# Altium PCB PCB3.PcbDoc
Units mm, origin at the board's own origin, x right, y up, seen from the top; angles counter-clockwise.
Board outline 58.4 x 51.85 mm, 2 copper layers (Top Layer, Bottom Layer); 29 components, 25 nets, 113 pads, 3 vias.
Unrouted connection lines stored in the file: 5.
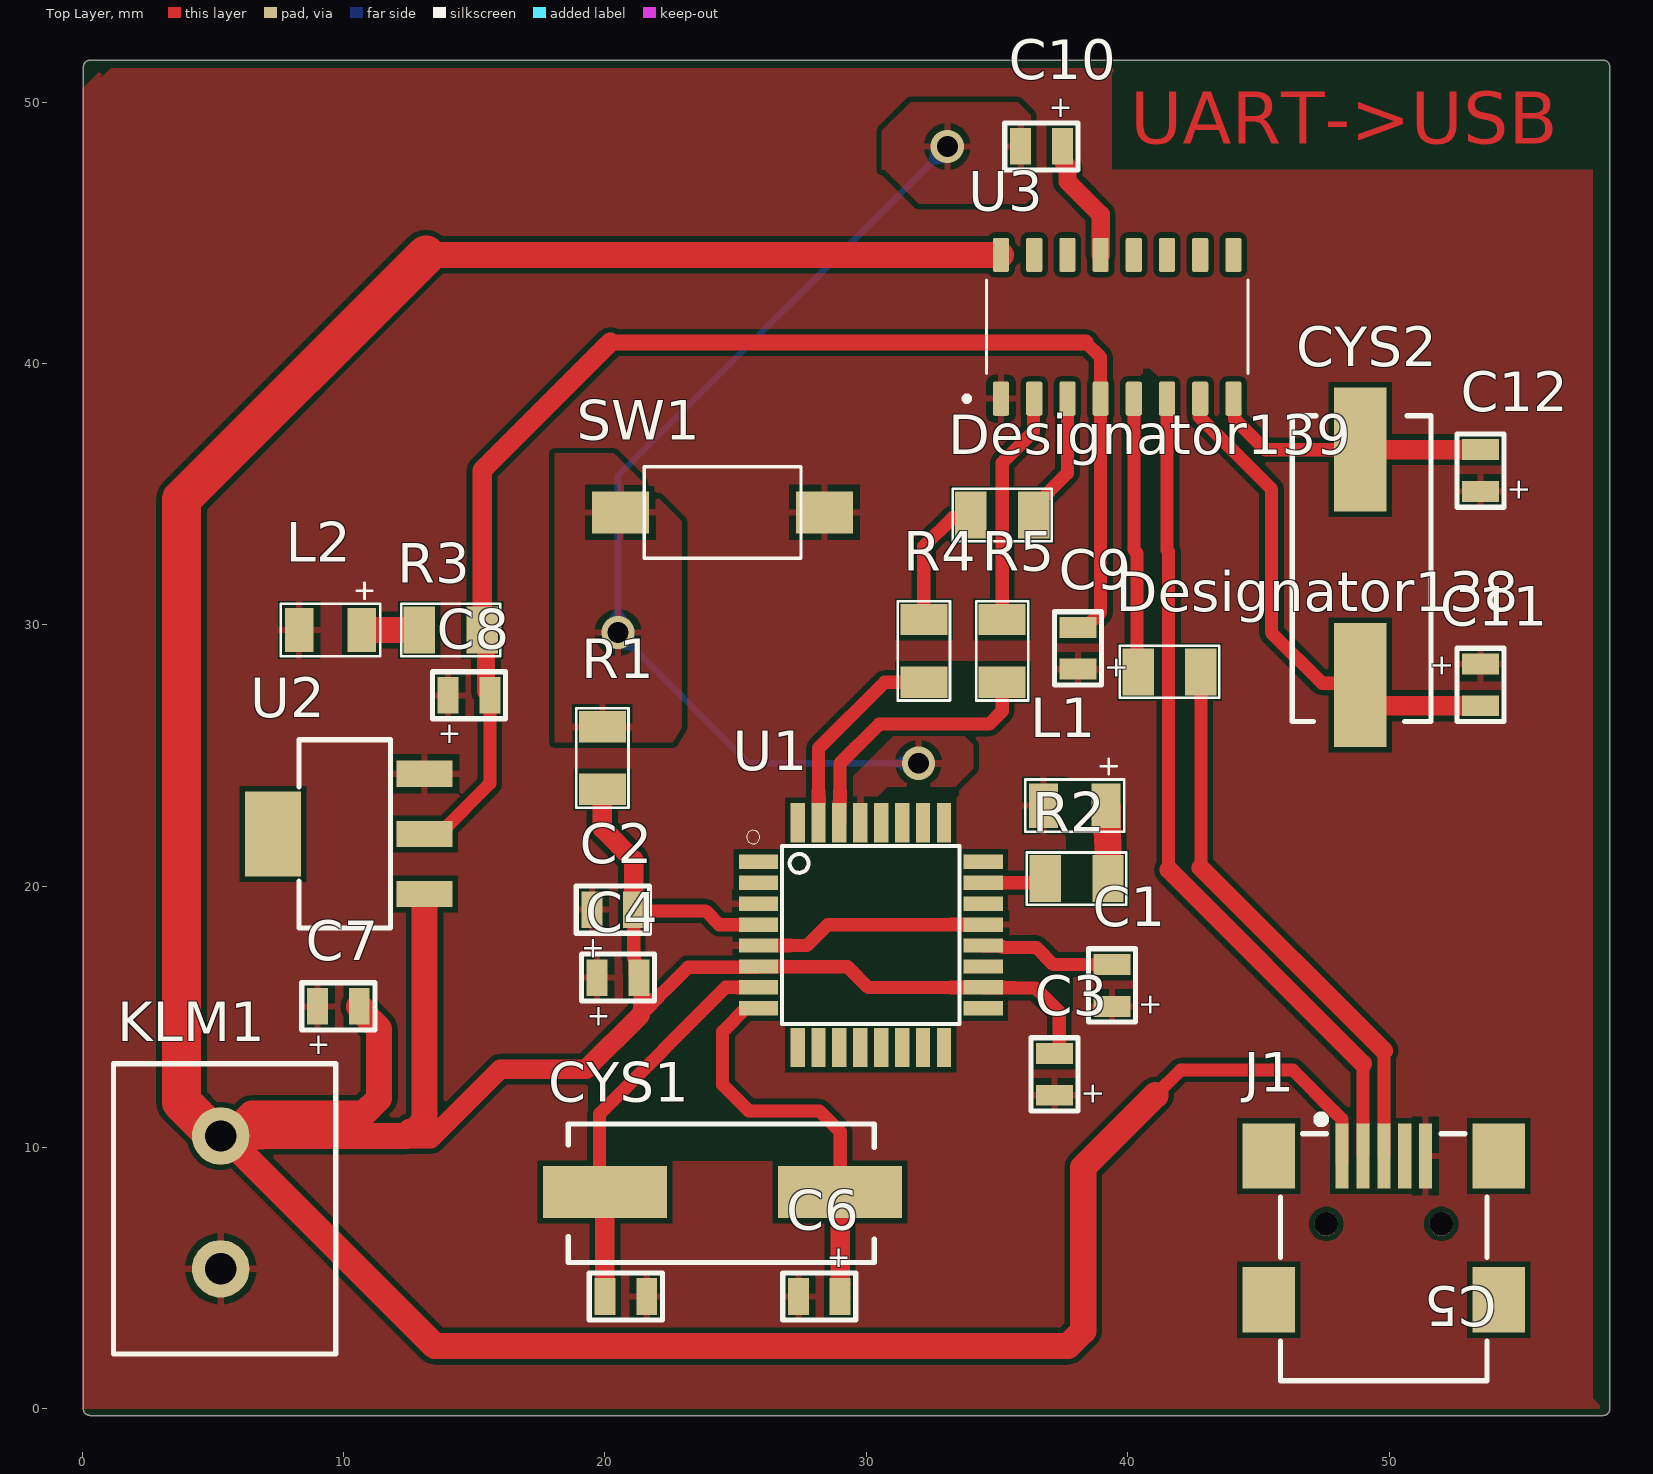
[diagram p0: Top Layer view]
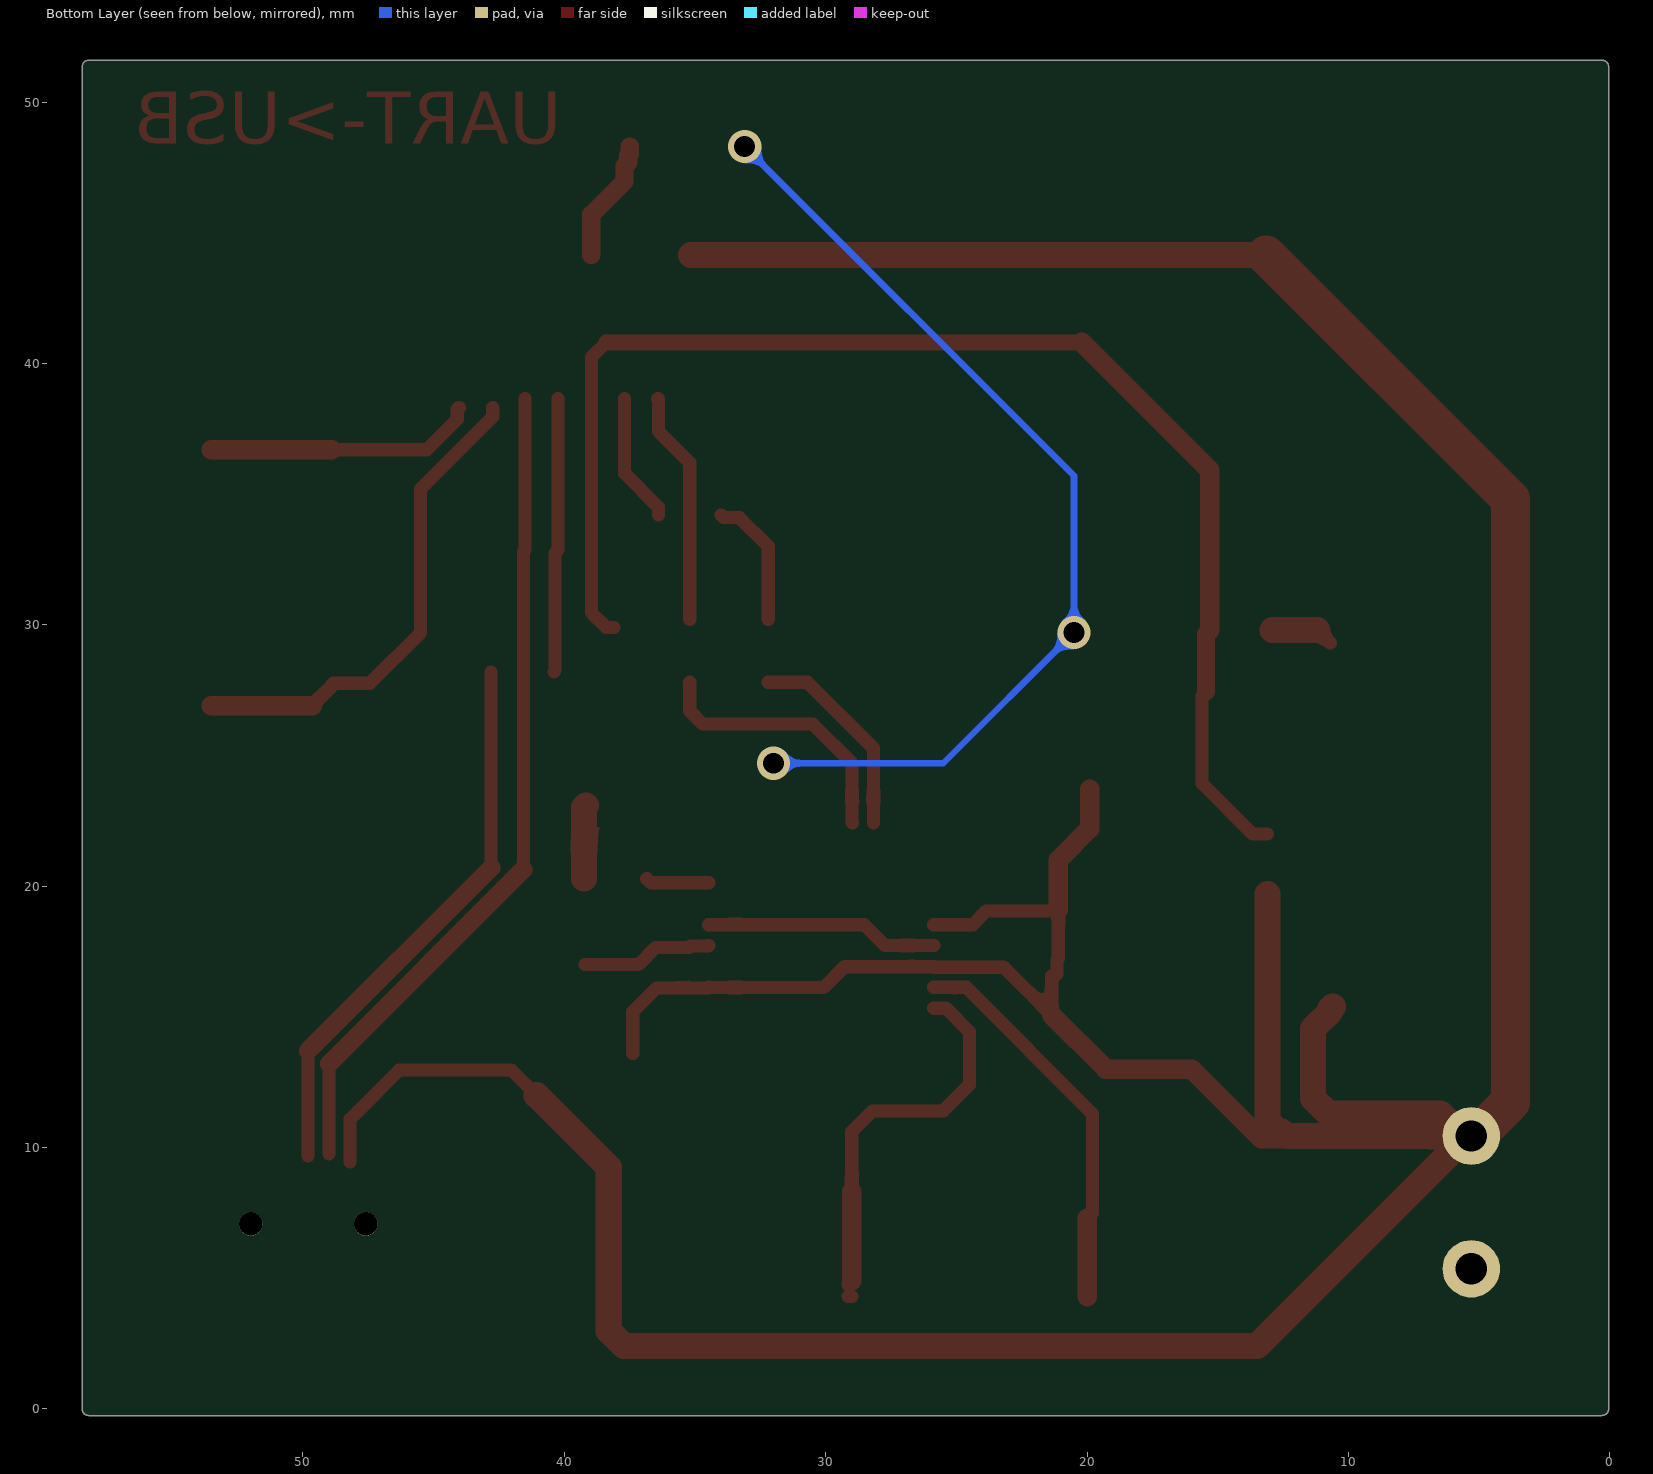
[diagram p1: Bottom Layer view, seen from below]
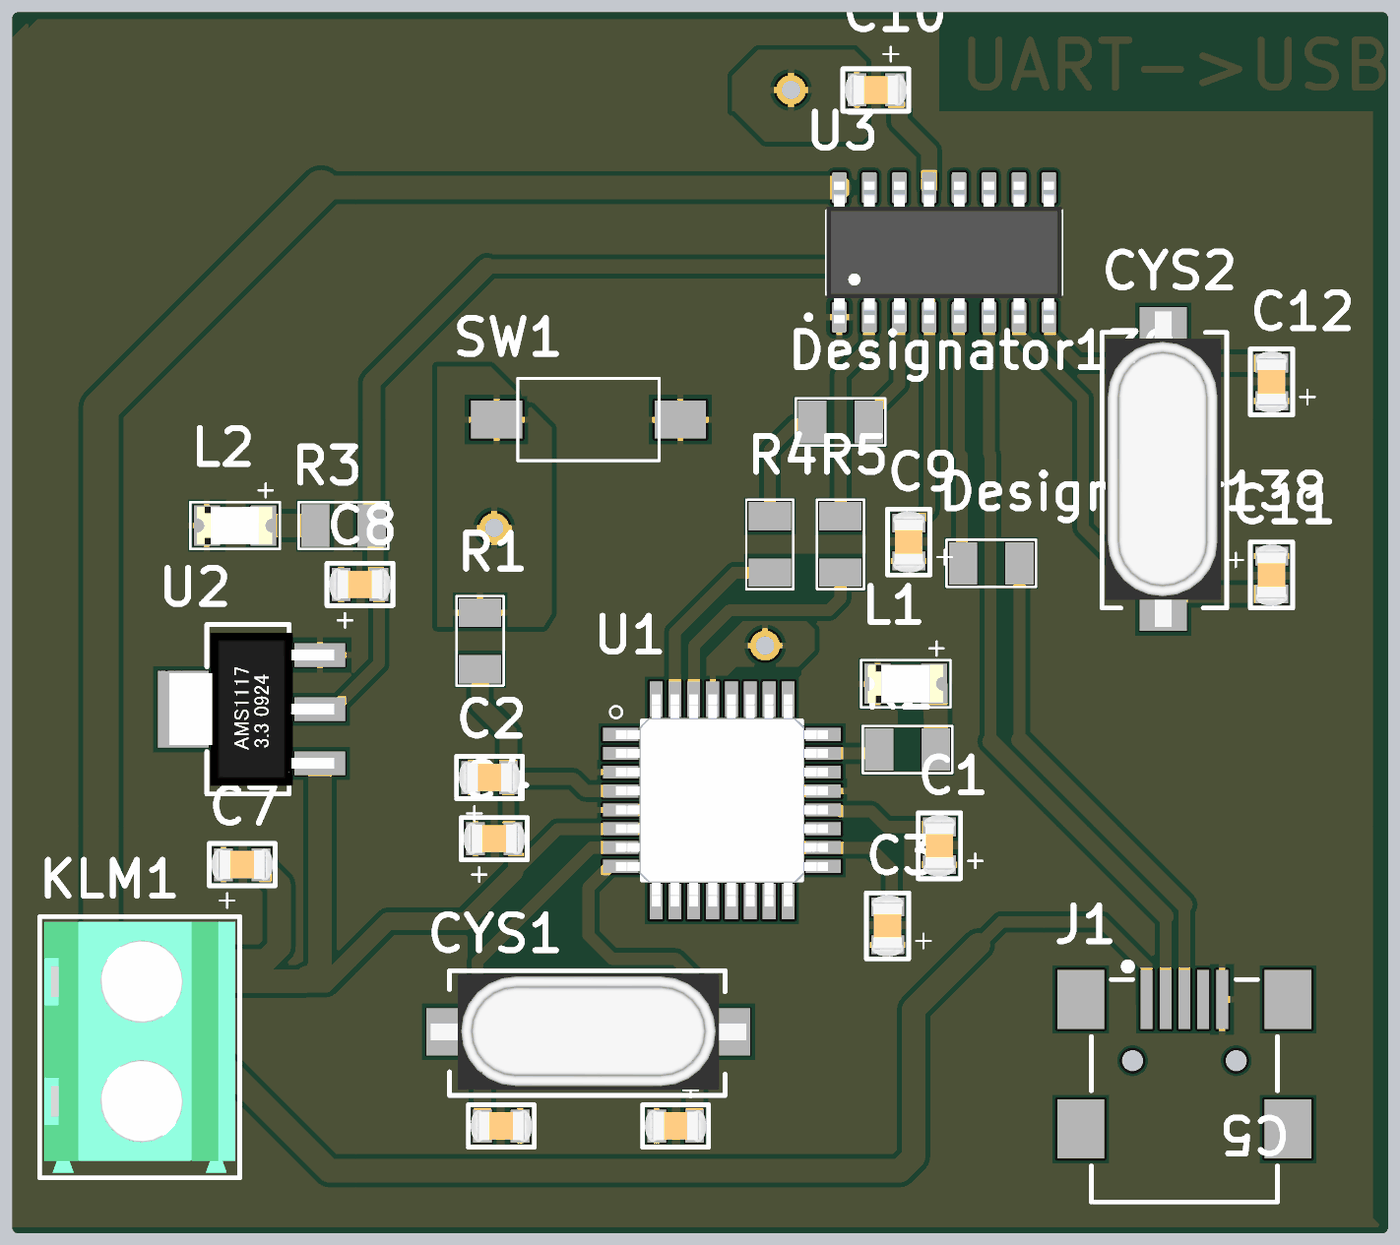
[diagram p2: 3D render of the assembled board from above, using the file's embedded part models]

## Layer stack, top to bottom
Top Solder: solder mask 0.0102, Solder Resist, Dk 3.5
Top Layer: signal copper 0.0356
Dielectric 1: dielectric 0.32, FR-4, Dk 4.8
Bottom Layer: signal copper 0.0356
Bottom Solder: solder mask 0.0102, Solder Resist, Dk 3.5

## Board outline
0.046,0 0.046,51.346 cw(c0.3,51.346) 0.3,51.6 58.192,51.6 cw(c58.192,51.346) 58.446,51.346 58.446,0 cw(c58.192,0) 58.192,-0.254 0.3,-0.254 cw(c0.3,0)

## Design rules (kind name [scope] priority, off if disabled: settings)
Clearance [All] p1: gap=0.2 ignorepadtopadclearanceinfootprint=FALSE
PolygonConnect [All] p1: connectstyle=Relief reliefconductorwidth=0.254 reliefentries=4 polygonreliefangle="90 Angle" airgapwidth=0.254
RoutingVias [All] p1: holewidth=0.711 width=1.27 viastyle="Through Hole" minholewidth=0.711 minwidth=1.27 maxholewidth=0.711 maxwidth=1.27
SolderMaskExpansion [All] p1: expansion=0.102 istentingtop=FALSE
Width [All] p1: maxlimit=1.5 minlimit=0.254 preferedwidth=0.254
30 further rules are at their usual default settings.

## Classes and differential pairs
component class Sheet3: C1 C2 C3 C4 C5 C6 C7 C8 C9 C10 C11 C12 CYS1 CYS2 J1 KLM1 L1 L2 R1 R2 R3 R4 R5 SW1 U1 U2 U3

## Components (designator, comment, footprint, x,y, rotation, side; value= is the part's Value field where it differs from the comment)
C1 "100nF" CAP_805 39.4,16.2 r90 top
C2 "1uF" CAP_805 20.3,19.1 r0 top
C3 "4.7uF" CAP_805 37.2,12.8 r90 top
C4 "1uF" CAP_805 20.5,16.5 r0 top
C5 "22pF" CAP_805 20.8,4.3 r180 top
C6 "22pF" CAP_805 28.2,4.3 r180 top
C7 "100nF" CAP_805 9.8,15.4 r0 top
C8 "100nF" CAP_805 14.8,27.3 r0 top
C9 "100nF" CAP_805 38.1,29.1 r90 top
C10 "100nF" CAP_805 36.7,48.3 r180 top
C11 "22pF" CAP_805 53.5,27.7 r270 top
C12 "22pF" CAP_805 53.5,35.9 r90 top
CYS1 "Kristal - HC-49Us" "Kristal - HC-49Us -smd" 24.5,8.3 r0 top
CYS2 "Kristal - HC-49Us" "Kristal - HC-49Us -smd" 48.9,32.2 r90 top
Designator138 "Comment" RES_1206 41.6,28.2 r0 top
Designator139 "Comment" RES_1206 35.2,34.2 r0 top
J1 "USB 2.0" 65100516121 49.8,5.8 r0 top
KLM1 "2 Pin Klemens" "5.08mm-2 pin" 5.3,7.9 r90 top
L1 "Led Blue" "Led 1206" 37.975,23.08 r180 top
L2 "Led Blue" "Led 1206" 9.5,29.8 r180 top
R1 "RES 1K 1206" RES_1206 19.9,24.9 r270 top
R2 "220" RES_1206 38.045,20.286 r180 top
R3 "220" RES_1206 14.1,29.8 r0 top
R4 "RES 1K 1206" RES_1206 32.2,29 r270 top
R5 "RES 1K 1206" RES_1206 35.2,29 r270 top
SW1 "1437566-3" SW_1437566-3 24.5,34.3 r180 top
U1 "ATMEGA328P-AU" QFP80P900X900X120-32N 30.171,18.127 r0 top
U2 "AMS1117" AMS1117 10.2,22 r90 top
U3 "CH340G" SOIC127P600X180-16N 39.6,41.4 r90 top

## Footprints (in the part's own frame and the unit in brackets; to place one, negate y for a bottom-side part, rotate by r counter-clockwise, add the part's x,y. Pads: shape width x height; smd on the part's side, far side on the other; paste and mask are expansions set on the pad)
"5.08mm-2 pin" [mm]
  round 2.2 hole 1.2 mask+0.05: 1(-2.54,0) 2(2.54,0)
  silkscreen extent -5.8,-4.4 5.3,4.1, body extent -5.59,-4.2 5.07,3.9, height 10.2
65100516121 [mm]
  rect 0.5x2.5 smd: 1(-1.6,3.875) 2(-0.8,3.875) 3(0,3.875) 4(0.8,3.875) 5(1.6,3.875)
  rect 2x2.5 smd: S1(-4.4,3.875) S2(4.4,3.875) S3(4.4,-1.625) S4(-4.4,-1.625)
  round 0.9 hole 0.9 unplated: ""(-2.2,1.275) ""(2.2,1.275)
  silkscreen extent -3.95,-4.72 3.95,5.37
AMS1117 [mm]
  rect 1x2.15 smd mask+0.05: 1(-2.3,-2.9) 2(0,-2.9) 3(2.3,-2.9)
  rect 3.25x2.15 smd mask+0.05: ""(0,2.9)
  silkscreen extent -3.6,-1.6 3.6,1.9, body extent -3.25,-3.5 3.25,3.5, height 1.85
CAP_805 [mm]
  rect 0.8x1.4 smd mask+0.05: 1(-0.8,0) 2(0.8,0)
  silkscreen extent -1.4,-0.9 1.4,0.9, body extent -1.3,-0.68 1.3,0.68, height 0.9
"Kristal - HC-49Us -smd" [mm]
  rect 4.75x2 smd mask+0.05: 1(-4.5,0) 2(4.5,0)
  silkscreen extent -5.9,-2.7 5.8,2.6, body extent -6.7,-2.45 6.7,2.45, height 5.08
"Led 1206" [mm]
  rect 1.1x1.7 smd mask+0.05: 1(-1.2,0) 2(1.2,0)
  silkscreen extent -1.9,-1.8 1.9,1, body extent -1.59,-0.8 1.61,0.8, height 1.1
QFP80P900X900X120-32N [mm]
  rect 1.5x0.55 smd: 1(-4.3,2.8) 2(-4.3,2) 3(-4.3,1.2) 4(-4.3,0.4) 5(-4.3,-0.4) 6(-4.3,-1.2) 7(-4.3,-2) 8(-4.3,-2.8) 17(4.3,-2.8) 18(4.3,-2) 19(4.3,-1.2) 20(4.3,-0.4) 21(4.3,0.4) 22(4.3,1.2) 23(4.3,2) 24(4.3,2.8)
  rect 0.55x1.5 smd: 9(-2.8,-4.3) 10(-2,-4.3) 11(-1.2,-4.3) 12(-0.4,-4.3) 13(0.4,-4.3) 14(1.2,-4.3) 15(2,-4.3) 16(2.8,-4.3) 25(2.8,4.3) 26(2,4.3) 27(1.2,4.3) 28(0.4,4.3) 29(-0.4,4.3) 30(-1.2,4.3) 31(-2,4.3) 32(-2.8,4.3)
  silkscreen extent -4.75,-3.4 3.4,4, body extent -4.5,-4.5 4.5,4.5, height 1.23
RES_1206 [mm]
  rect 1.2x1.8 smd mask+0.05: 1(-1.2,0) 2(1.2,0)
  silkscreen extent -1.9,-1 1.9,1, body extent -1.57,-0.82 1.57,0.82, height 0.53
SOIC127P600X180-16N [mm]
  rrect25% 1.31x0.62 smd: 1(-2.75,4.445) 2(-2.75,3.175) 3(-2.75,1.905) 4(-2.75,0.635) 5(-2.75,-0.635) 6(-2.75,-1.905) 7(-2.75,-3.175) 8(-2.75,-4.445) 9(2.75,-4.445) 10(2.75,-3.175) 11(2.75,-1.905) 12(2.75,-0.635) 13(2.75,0.635) 14(2.75,1.905) 15(2.75,3.175) 16(2.75,4.445)
  silkscreen extent -2.85,-5 1.78,5.85, body extent -3,-5 3,5, height 1.8
SW_1437566-3 [mm]
  rect 2.18x1.6 smd: 1(-3.9,0) 2(3.9,0)
  silkscreen extent -3,-1.75 3,1.75

## Part data
C1 C2 C3 C4 C5 C6 C7 C8 C9 C10 C11 C12: library part "CAP 22uf 0805", "0805 smd"
CYS1 CYS2: "Smd tipi kristal"
J1: "USB - mini B USB 2.0 Receptacle Connector 5 Position Surface Mount, Right Angle", Package=None, Availability="In Stock", Check_prices=https://www.snapeda.com/parts/65100516121/Wurth+Elektronik/view-part/?ref=eda, MF="WÃ¼rth Elektronik", MP=65100516121, Price=None, Purchase-URL=https://pricing.snapeda.com/search/part/65100516121/?ref=eda, SnapEDA_Link=https://www.snapeda.com/parts/65100516121/Wurth+Elektronik/view-part/?ref=snap
KLM1: "5.08mm 2 pin klemens"
R2 R3: library part "RES 1K 1206"
SW1: "Switch Tactile OFF (ON) SPST Rectangular Button Gull Wing 0.05A 12VDC SMD Loose Piece", Package=None, Availability=Unavailable, MP=1437566-3, Price=None
U1: "AVR AVRÂ® ATmega Microcontroller IC 8-Bit 20MHz 32KB (16K x 16) FLASH 32-TQFP (7x7)", Package="TQFP-32 Microchip", Availability="In Stock", Check_prices=https://www.snapeda.com/parts/ATMEGA328P-AU/Microchip/view-part/?ref=eda, MF="Microchip Technology", MP=ATMEGA328P-AU, Price=None, Purchase-URL=https://pricing.snapeda.com/search/part/ATMEGA328P-AU/?ref=eda, SnapEDA_Link=https://www.snapeda.com/parts/ATMEGA328P-AU/Microchip/view-part/?ref=snap
U2: "3V3 Voltage Regulator", Case/Package=SOT-89, Vmax=12V, Iout=1A
U3: "USB Interface Integrated Circuit", Package=None, Availability="Not in stock", Check_prices=https://www.snapeda.com/parts/Ch340G/WCH/view-part/?ref=eda, MF=WCH, MP=Ch340G, Price=None, SnapEDA_Link=https://www.snapeda.com/parts/Ch340G/WCH/view-part/?ref=snap

## Via types
v1: diameter 1.27, hole 0.8, Top Layer to Bottom Layer, 3 vias

## Nets (pads, with @x,y where several pads share a name; then routed paths per layer and width w, separated by ;. In a path a pad name is that pad's centre, name@x,y a point inside that pad or via, vN(x,y) a via of type N, cw(c..) or ccw(c..) an arc to the next point about the centre after c; other vN are vias at no path point)
+3V3: C8.2 C9.2 R3.2 U2.2 U3.4 | length 52.2
  Top Layer w0.5: U2.2 13.675,22 15.6,23.925 C8.2 C8.2@15.45,27.45 ; R3.2 R3.2@15.45,29.65 ; C9.2 38.4,29.9 38.965,30.465 U3.4 38.965,40.235 38.4,40.8
  Top Layer w0.6: 20.2,40.8 38.4,40.8
  Top Layer w0.7: C8.2@15.45,27.45 R3.2@15.45,29.65
  Top Layer w0.75: R3.2 15.3,35.9 20.2,40.8
+5V: C2.2 C3.2 C4.2 C7.2 J1.1 KLM1.2 R1.2 U1.4 U1.6 U1.18 U2.1 U3.16 | length 187.8
  Top Layer w0.5: 41.06,12 42.027,12.967 46.315,12.967 47.907,11.375 48.2,11.082 J1.1@48.2,9.449
  Top Layer w0.508: C2.2 21.1,17.244 21.154,17.19 21.154,16.646 C4.2 ; C2.2@21.246,19.051 23.849,19.051 24.373,18.527 U1.4 ; C4.2@21.354,16.554 21.354,15.074 23.18,16.9 25.844,16.9 U1.6 25.879,16.919 29.281,16.919 30.081,16.119 34.463,16.119 U1.18 34.492,16.106 36.468,16.106 37.378,15.196 C3.2@37.378,13.6
  Top Layer w0.75: 12.56,10.34 13.34,10.34 16,13 19.28,13 21.354,15.074 ; 12.56,10.6 13.1,11.14 ; R1.2 19.9,22.2 21.1,21 C2.2
  Top Layer w1: KLM1.2@5.56,10.34 13.5,2.4 37.714,2.4 38.3,2.986 38.3,9.24 41.06,12 ; C7.2 10.7,15.3 10.7,15.2 11.362,14.538 11.362,11.886 10.776,11.3 6.485,11.3 5.625,10.44 KLM1.2 12.4,10.44 12.56,10.6 ; 13.1,11.14 U2.1 ; 13.15,44.15 U3.16
  Top Layer w1.5: KLM1.2@5.2,10.34 3.8,11.74 3.8,34.8 13.15,44.15
AREF: C1.2 U1.20 | length 5
  Top Layer w0.508: U1.20 34.492,17.706 35.158,17.706 35.208,17.656 36.502,17.656 37.158,17 C1.2@39.2,17
GND: C1.1 C2.1 C3.1 C4.1 C5.1 C6.2 C7.1 C8.1 C9.1 C11.1 C12.1 J1.5 KLM1.1 L1.2 L2.2 SW1.1 U1.3 U1.5 U1.21 U2.3 U3.1 | length 8.9
  Top Layer w0.508: U1.5 27.727,17.727 28.527,18.527 U1.21
MISO: U1.16
MOSI: U1.17
NetC10_1: C10.1 U3.13 | length 4.8
  Top Layer w0.7: C10.1 37.5,48 37.55,47.95 37.55,47.685 37.695,47.54 37.695,46.962 38.965,45.692 U3.13
NetC11_2: C11.2 CYS2.1 U3.7 | length 18.9
  Top Layer w0.508: U3.7@42.74,38.3 42.74,37.955 45.5,35.195 45.5,29.7 47.436,27.764 48.836,27.764 CYS2.1 48.9,27.646 CYS2.1@49.646,26.9
  Top Layer w0.75: CYS2.1@49.646,26.9 C11.2
NetC12_2: C12.2 CYS2.2 U3.8 | length 10.4
  Top Layer w0.508: U3.8@44.01,38.3 44.05,38.3 44.101,38.249 44.101,37.864 45.265,36.7 CYS2.2
  Top Layer w0.75: CYS2.2 C12.2
NetCON3_1: U1.28
NetCON3_2: U1.27
NetJ1_S1: J1.S1 J1.S2 J1.S3 J1.S4
NetL1_1: L1.1 R2.1 | length 2.8
  Top Layer w1: L1.1 39.245,23.01 R2.1
NetL2_1: L2.1 R3.1 | length 2.4
  Top Layer w0.508: L2.1@10.7,29.3 L2.1@11.2,29.8
  Top Layer w1: L2.1@11.2,29.8 R3.1
NetR2_2: R2.2 U1.23 | length 2.4
  Top Layer w0.508: U1.23 36.686,20.127 R2.2
NetR4_1: Designator139.1 Designator139.2 R4.1 U3.3 | length 10.1
  Top Layer w0.508: R4.1 32.2,33 33.3,34.1 33.9,34.1 Designator139.1 ; Designator139.2 36.4,34.5 37.695,35.795 U3.3
NetR5_1: R5.1 U3.2 | length 9
  Top Layer w0.508: R5.1 35.2,36.2 36.4,37.4 36.4,38.625 U3.2
OSC1: C5.2 CYS1.1 U1.7 | length 15.2
  Top Layer w0.508: CYS1.1@20,7.3 19.793,7.507 19.793,11.293 24.627,16.127 U1.7
  Top Layer w0.75: C5.2 CYS1.1@20,7.3
OSC2: C6.1 CYS1.2 U1.8 | length 15.1
  Top Layer w0.508: U1.8 25.396,15.327 24.5,14.431 24.5,12.4 25.5,11.4 28.2,11.4 29,10.6 CYS1.2 ; C6.1 C6.1@29.15,4.3 ; C6.1@29,4.9 C6.1@29.15,4.75
  Top Layer w0.75: C6.1@29,4.9 CYS1.2
RESET: C10.2 R1.1 SW1.2 U1.29 | length 37.4
  Bottom Layer w0.254: v1(32,24.7) 25.5,24.7 v1(20.5,29.7) 20.5,35.7 v1(33.1,48.3)
RXD: R4.2 U1.31 | length 7.9
  Top Layer w0.508: U1.31 28.171,25.271 30.7,27.8 R4.2
SCK: U1.15
TXD: R5.2 U1.30 | length 10.4
  Top Layer w0.508: U1.30 28.992,22.448 28.992,24.692 30.5,26.2 34.7,26.2 35.2,26.7 R5.2
USBD+: Designator138.1 Designator138.2 J1.3 U3.5 | length 31.9
  Top Layer w0.5: U3.5 40.235,32.865 40.35,32.75 40.35,28.25 Designator138.1 ; 42.8,20.7 Designator138.2 ; J1.3 49.8,13.7
  Top Layer w0.7: 42.8,20.7 49.8,13.7
USBD-: J1.2 U3.6 | length 32
  Top Layer w0.5: U3.6 41.505,32.865 41.57,32.8 41.57,20.63 ; J1.2@49,9.749 49,13.2
  Top Layer w0.7: 41.57,20.63 49,13.2
pads on no net: J1. J1.4 U1.1 U1.2 U1.9 U1.10 U1.11 U1.12 U1.13 U1.14 U1.19 U1.22 U1.24 U1.25 U1.26 U1.32 U2. U3.9 U3.10 U3.11 U3.12 U3.14 U3.15

## Polygon pours and split planes (outlines as drawn)
GND on Top Layer "GND_L01_P005" (solid, remove dead copper, pour order 5): 0.7,50.9 1.1,51.3 57.8,51.3 57.8,0.4 58.2,0 0,0 0,50.5 0.8,51.3
RESET on Top Layer "RESET_L01_P004" (solid, pour order 4): 29.5,21.8 29.6,21.7 30,21.7 30,23 30.8,23.8 33.4,23.8 34.1,24.5 34.1,25.4 33.7,25.8 31.1,25.8 29.5,24.2 29.5,21.7 30,21.7
RESET on Top Layer "RESET_L01_P002" (solid, pour order 2): 36.3,49.5 35.8,50 31.7,50 30.6,48.9 30.6,47.4 30.7,47.4 32,46.1 36.1,46.1 36.4,46.4 36.3,46.5
RESET on Top Layer "RESET_L01_P001" (solid, pour order 1): 22.945,26.055 22.945,33.955 20.346,36.554 18.073,36.554 18.073,25.5 22.6,25.5

## Other copper
Top Layer:
  pour cut-out: 39.5,51.2 39.4,51.1 39.4,47.4 58,47.4 57.8,47.6 57.8,51.3 42.7,51.3 42.6,51.2
  pour cut-out: 30.892,27.337 30.309,26.754 30.372,26.692 30.372,26.637 34.483,26.637 34.692,26.846 34.692,27 34.1,27 34.1,28.6 33.3,28.6 33.3,27 31.1,27 31.4,27.2 30.892,27.337 31.1,27.337
  pour cut-out: 30.884,23.596 30.884,23.43 30.854,23.4 33.423,23.4 33.446,23.377 33.544,23.475 33.544,23.656 32.617,23.656 32.406,23.867 31.875,23.867 31.604,23.596 30.884,23.596 30.783,23.494 30.831,23.446 30.831,23.377
  pour cut-out: 37.579,24.184 37.633,24.13 38.425,24.13 38.425,19.206 38.445,19.186 37.645,19.186 37.645,24.118 37.763,24 38.6,24
  pour cut-out: 35.421,17.193 35.421,16.569 36.61,16.569 37.655,15.524 37.705,15.524 37.705,15.332 37.841,15.196 37.9,15.256 37.9,16.6 37.221,16.6 37.158,16.537 36.502,17.193 36.311,17.193
  pour cut-out: 23.372,16.437 24.117,16.437 24.117,16.317 19.365,11.565 19.365,12.665 21.7,15 22.2,15 22.2,15.1 23.372,16.272 23.372,16.437 23.737,16.437 23.8,16.5
  pour cut-out: 24.753,15.598 20.256,11.101 20.256,9.5 28.537,9.5 28.537,10.408 28.392,10.408 27.8,11 27.737,10.937 24.963,10.937 23.8,12.1 23.8,14.3 24.898,15.398 24.898,15.483 24.868,15.483 24.753,15.598 24.555,15.4 24.5,15.4
  pour cut-out: 42.029,27.1 42.029,20.964 42.153,20.84 42.153,20.953 42.4,21.2 42.341,21.259 42.341,27.1 42.3,27.1 42.2,27.2 42.1,27.1
  pour cut-out: 40.809,29.3 40.909,29.4 41.211,29.4 41.111,29.3 41.046,29.365 41.046,34.654 41,34.7 41.1,34.8 41.1,37.858 41.046,37.912 41.2,38.066 41.2,39.453 40.853,39.8 40.6,39.8 40.6,39.378 40.75,39.227 40.2,38.677 40.2,37.5 40.6,37.1 40.6,34.8 40.5,34.7 40.5,32.9 40.35,32.75 40.6,32.5 40.7,32.5 40.7,32 40.8,31.9 40.7,31.8 40.7,29.7 40.809,29.591
  pour cut-out: 33.47,14.812 33.521,14.863 33.521,15.637 29.958,15.637 29.131,16.464 26.821,16.464 26.863,16.422 26.863,14.819 33.463,14.819
  pour cut-out: 26.774,21.409 26.875,21.308 26.875,17.39 29.415,17.39 30.242,16.563 33.521,16.563 33.481,16.603 33.481,21.453 26.978,21.453 26.957,21.474
  text "UART->USB" at 40.1,48.4 h2

## Silkscreen, mask and mechanical layers (free items; w line width, h text height)
Mechanical 1:
  the board outline again, w1

## Text inside footprints (layer, text, board x,y; h text height)
C1: Top Overlay "+" at 41.233,15 h0.8 r90
C2: Top Overlay "+" at 19.1,17.267 h0.8
C3: Top Overlay "+" at 39.033,11.6 h0.8 r90
C4: Top Overlay "+" at 19.3,14.667 h0.8
C5: Top Overlay "+" at 69.722,5.476 h0.8 r180
C6: Top Overlay "+" at 29.4,6.133 h0.8 r180
C7: Top Overlay "+" at 8.6,13.567 h0.8
C8: Top Overlay "+" at 13.6,25.467 h0.8
C9: Top Overlay "+" at 39.933,27.9 h0.8 r90
C10: Top Overlay "+" at 37.9,50.133 h0.8 r180
C11: Top Overlay "+" at 51.667,28.9 h0.8 r270
C12: Top Overlay "+" at 55.333,34.7 h0.8 r90